# EAGLE board plat_4pinTo40pin (EAGLE 5.11)
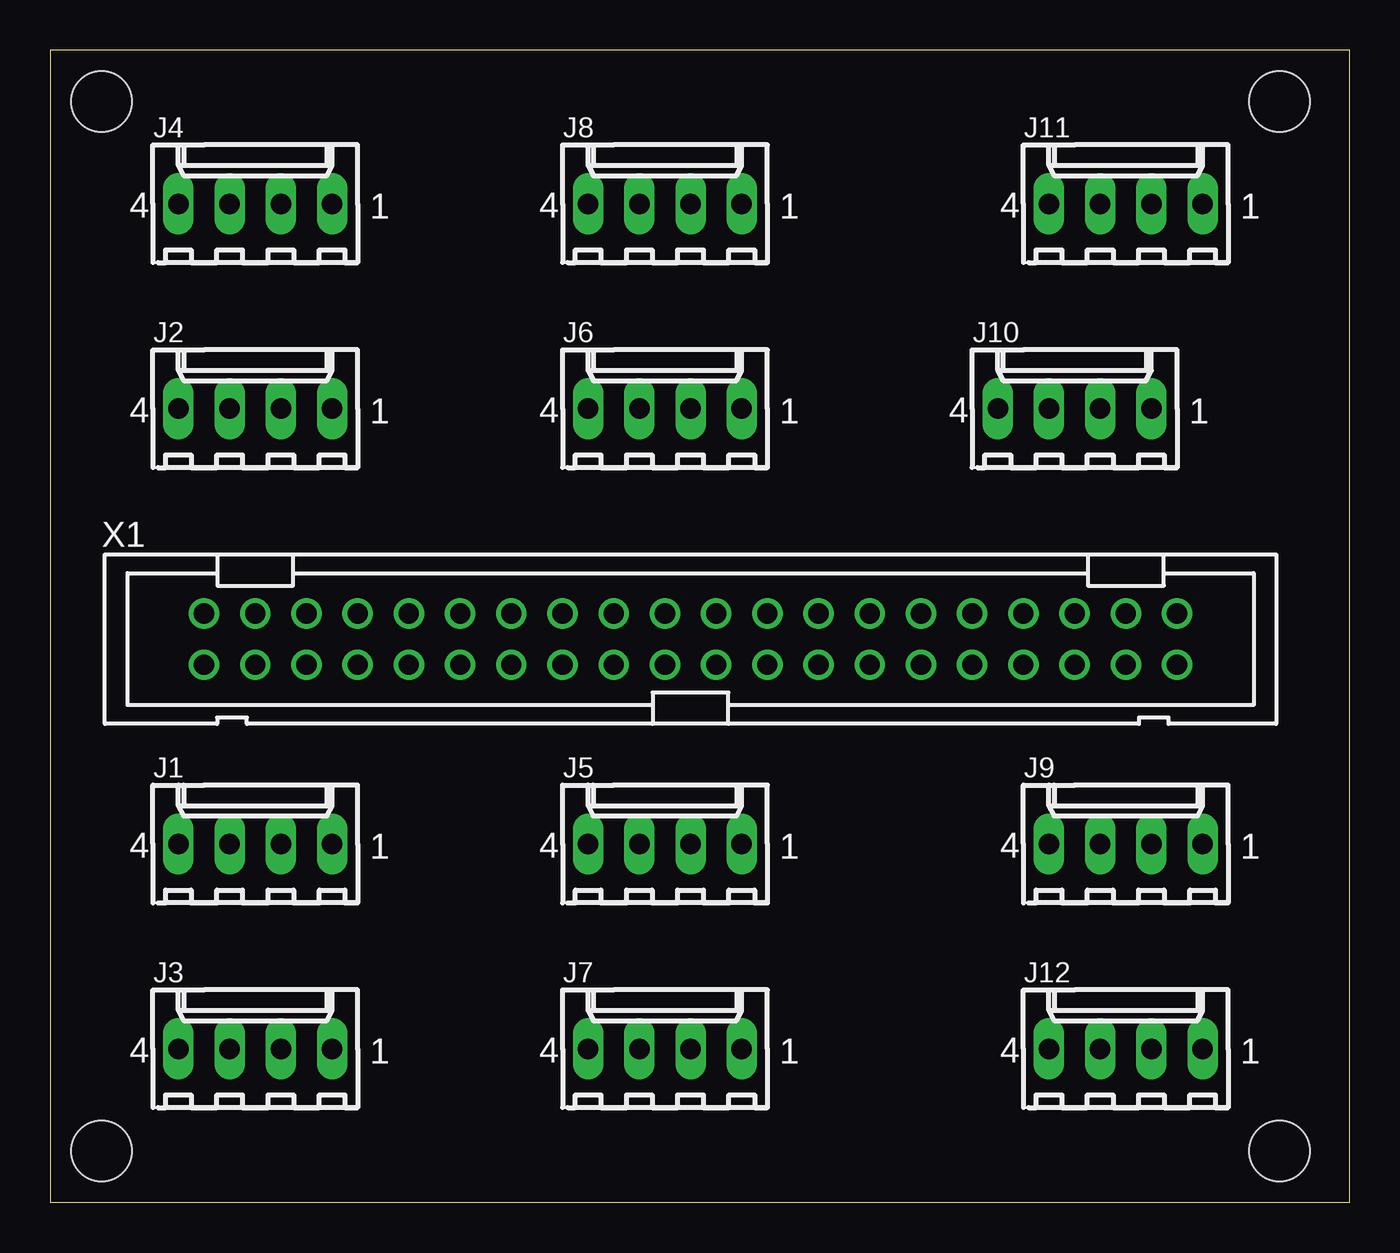
[diagram p0: board, top side]
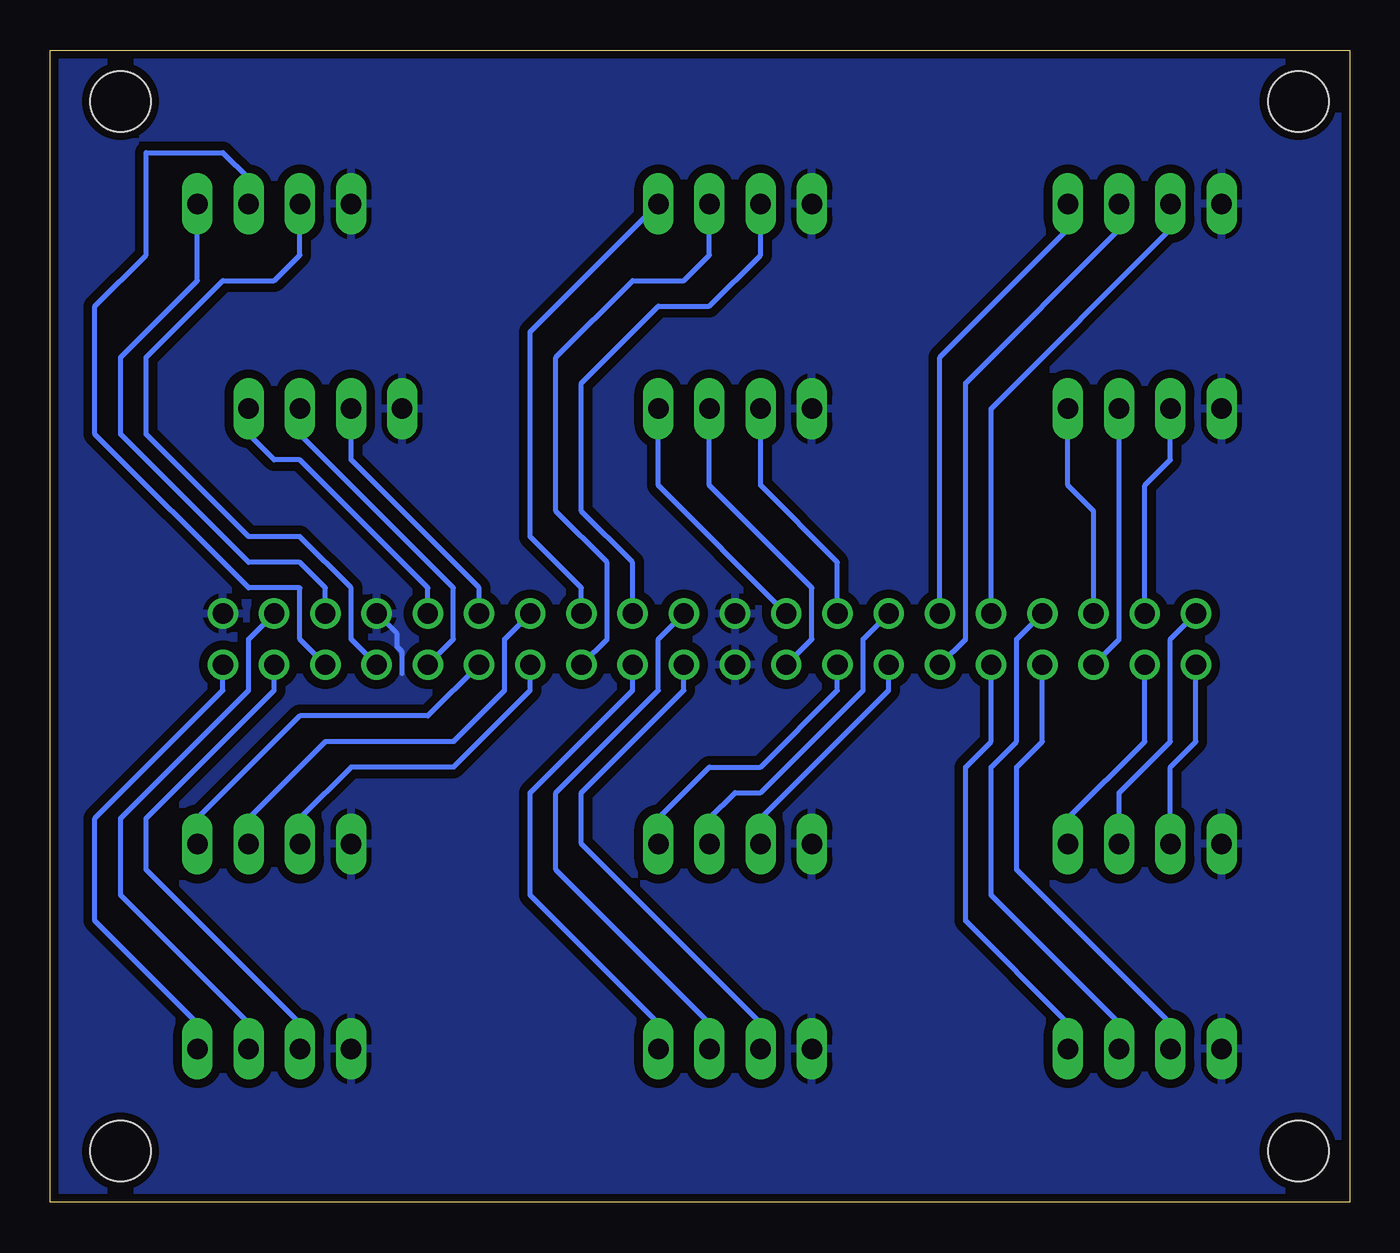
[diagram p1: board, bottom side, seen from below]

Size 64.44 x 57.14 mm. Coordinates in mm from the lower left corner, seen from the top.
Outline: 0,0 64.44,0 64.44,57.14 0,57.14 0,0
Copper layers (1*16): Top 0.035mm / dielectric 1.5mm / Bottom 0.035mm
Design rules "default *": minimum track width 10mil, minimum drill 24mil, track to track 17mil, track to pad 15mil, pad to pad 17mil, via to via 16mil, smd to smd 15mil, copper to edge 16mil, drill to drill 8mil, minimum pad ring 10mil, minimum via ring 8mil, stop-mask expansion 4mil, vias tented up to drill 0mil, thermal gap 10mil
Holes 3 mm at 2.54,54.61 2.54,2.54 60.96,54.61 60.96,2.54

## Footprints (pad centres in the part's own frame; a part is rotated, then mirrored left to right if it is on the bottom)
6410-04 = drill 1.016 long: 1 3.81,0; 2 1.27,0; 3 -1.27,0; 4 -3.81,0
PAK100/2500-40 = drill 1 pad 1.422 round: 1 -24.13,-1.27; 2 -24.13,1.27; 3 -21.59,-1.27; 4 -21.59,1.27; 5 -19.05,-1.27; 6 -19.05,1.27; 7 -16.51,-1.27; 8 -16.51,1.27; 9 -13.97,-1.27; 10 -13.97,1.27; 11 -11.43,-1.27; 12 -11.43,1.27; 13 -8.89,-1.27; 14 -8.89,1.27; 15 -6.35,-1.27; 16 -6.35,1.27; 17 -3.81,-1.27; 18 -3.81,1.27; 19 -1.27,-1.27; 20 -1.27,1.27; 21 1.27,-1.27; 22 1.27,1.27; 23 3.81,-1.27; 24 3.81,1.27; 25 6.35,-1.27; 26 6.35,1.27; 27 8.89,-1.27; 28 8.89,1.27; 29 11.43,-1.27; 30 11.43,1.27; 31 13.97,-1.27; 32 13.97,1.27; 33 16.51,-1.27; 34 16.51,1.27; 35 19.05,-1.27; 36 19.05,1.27; 37 21.59,-1.27; 38 21.59,1.27; 39 24.13,-1.27; 40 24.13,1.27

## Placement (x,y rotation side)
J1  22-27-2041-04  [6410-04]  10.16,17.78 0 top
J2  22-27-2041-04  [6410-04]  10.16,39.37 0 top
J3  22-27-2041-04  [6410-04]  10.16,7.62 0 top
J4  22-27-2041-04  [6410-04]  10.16,49.53 0 top
J5  22-27-2041-04  [6410-04]  30.48,17.78 0 top
J6  22-27-2041-04  [6410-04]  30.48,39.37 0 top
J7  22-27-2041-04  [6410-04]  30.48,7.62 0 top
J8  22-27-2041-04  [6410-04]  30.48,49.53 0 top
J9  22-27-2041-04  [6410-04]  53.34,17.78 0 top
J10  22-27-2041-04  [6410-04]  50.8,39.37 0 top
J11  22-27-2041-04  [6410-04]  53.34,49.53 0 top
J12  22-27-2041-04  [6410-04]  53.34,7.62 0 top
X1  2540-  [PAK100/2500-40]  31.75,27.94 0 top

## Library data of the parts
J1-J12 = con-molex; OC_FARNELL: unknown; OC_NEWARK: unknown
X1 = con-3m; OC_FARNELL: unknown; OC_NEWARK: unknown

## Nets
GND: J1.4 J2.4 J3.4 J4.4 J5.4 J6.4 J7.4 J8.4 J9.4 J10.4 J11.4 J12.4 X1.19 X1.20 X1.34 X1.40
NET_1: J1.3 X1.1
NET_2: J1.2 X1.2
NET_3: J1.1 X1.3
NET_4: J2.3 X1.4
NET_5: J2.2 X1.5
NET_6: J2.1 X1.6
NET_7: J3.3 X1.7
NET_8: J3.2 X1.8
NET_9: J3.1 X1.9
NET_10: J4.3 X1.10
NET_11: J4.2 X1.11
NET_12: J4.1 X1.12
NET_13: J5.3 X1.13
NET_14: J5.2 X1.14
NET_15: J5.1 X1.15
NET_16: J6.3 X1.16
NET_17: J6.2 X1.17
NET_18: J6.1 X1.18
NET_21: J7.3 X1.21
NET_22: J7.2 X1.22
NET_23: J7.1 X1.23
NET_24: J8.3 X1.24
NET_25: J8.2 X1.25
NET_26: J8.1 X1.26
NET_27: J9.3 X1.27
NET_28: J9.2 X1.28
NET_29: J9.1 X1.29
NET_30: J10.3 X1.30
NET_31: J10.2 X1.31
NET_32: J10.1 X1.32
NET_33: J11.3 X1.33
NET_35: J11.2 X1.35
NET_36: J11.1 X1.36
NET_37: J12.3 X1.37
NET_38: J12.2 X1.38
NET_39: J12.1 X1.39

## Tracks (layer width: path | path; a pad name or v marks a point on that pad's centre or on a via)
GND
  Bottom 0.254: X1.34 47.24,28.19 47.24,27.56 46.99,27.3 46.99,26.42 46.99,26.24
  pour Bottom (isolate 0.254): 66.04,58.42 -1.27,58.42 0,0 64.77,0
NET_1
  Bottom 0.254: X1.1 7.62,22.86 8.89,21.59 J1.3
NET_2
  Bottom 0.254: X1.2 8.89,27.94 8.89,22.86 11.43,20.32 J1.2
NET_3
  Bottom 0.254: X1.3 10.16,22.86 13.97,19.05 J1.1
NET_4
  Bottom 0.254: X1.4 10.16,35.56 8.89,36.83 J2.3
NET_5
  Bottom 0.254: X1.5 11.43,27.94 J2.2
NET_6
  Bottom 0.254: X1.6 12.7,34.29 13.97,35.56 J2.1
NET_7
  Bottom 0.254: J3.3 8.89,8.89 16.51,16.51 16.51,21.59 15.24,22.86 X1.7
NET_8
  Bottom 0.254: X1.8 16.51,27.94 16.51,22.86 17.78,21.59 17.78,15.24 11.43,8.89 J3.2
NET_9
  Bottom 0.254: J3.1 13.97,8.89 19.05,13.97 19.05,21.59 17.78,22.86 X1.9
NET_10
  Bottom 0.254: X1.10 17.78,39.37 8.89,48.26 J4.3
NET_11
  Bottom 0.254: X1.11 19.05,27.94 19.05,40.64 11.43,48.26 J4.2
NET_12
  Bottom 0.254: J4.1 13.97,48.26 20.32,41.91 X1.12
NET_13
  Bottom 0.254: J5.3 29.21,19.05 22.86,25.4 X1.13
NET_14
  Bottom 0.254: X1.14 24.13,27.94 24.13,25.4 29.21,20.32 30.48,20.32 31.75,19.05 J5.2
NET_15
  Bottom 0.254: X1.15 25.4,25.4 29.21,21.59 31.75,21.59 34.29,19.05 J5.1
NET_16
  Bottom 0.254: X1.16 25.4,31.75 29.21,35.56 J6.3
NET_17
  Bottom 0.254: X1.17 26.67,27.94 26.67,30.48 31.75,35.56 J6.2
NET_18
  Bottom 0.254: X1.18 34.29,35.56 J6.1
NET_21
  Bottom 0.254: X1.21 33.02,25.4 38.1,20.32 38.1,17.78 29.21,8.89 J7.3
NET_22
  Bottom 0.254: X1.22 34.29,27.94 34.29,25.4 39.37,20.32 39.37,16.51 31.75,8.89 J7.2
NET_23
  Bottom 0.254: X1.23 35.56,25.4 40.64,20.32 40.64,15.24 34.29,8.89 J7.1
NET_24
  Bottom 0.254: X1.24 35.56,31.75 38.1,34.29 38.1,40.64 34.29,44.45 31.75,44.45 29.21,46.99 J8.3
NET_25
  Bottom 0.254: X1.25 36.83,27.94 36.83,31.75 39.37,34.29 39.37,41.91 35.56,45.72 33.02,45.72 31.75,46.99 J8.2
NET_26
  Bottom 0.254: X1.26 38.1,30.48 40.64,33.02 40.64,43.18 J8.1
NET_27
  Bottom 0.254: X1.27 40.64,25.4 44.45,21.59 49.53,21.59 52.07,19.05 J9.3
NET_28
  Bottom 0.254: X1.28 41.91,27.94 41.91,25.4 44.45,22.86 50.8,22.86 54.61,19.05 J9.2
NET_29
  Bottom 0.254: X1.29 45.72,24.13 52.07,24.13 57.15,19.05 J9.1
NET_30
  Bottom 0.254: X1.30 43.18,30.48 49.53,36.83 J10.3
NET_31
  Bottom 0.254: X1.31 44.45,27.94 44.45,30.48 52.07,38.1 J10.2
NET_32
  Bottom 0.254: X1.32 45.72,30.48 52.07,36.83 53.34,36.83 54.61,38.1 J10.1
NET_33
  Bottom 0.254: X1.33 49.53,27.94 49.53,30.48 52.07,33.02 54.61,33.02 59.69,38.1 59.69,41.91 55.88,45.72 53.34,45.72 52.07,46.99 J11.3
NET_35
  Bottom 0.254: X1.35 52.07,27.94 52.07,30.48 54.61,30.48 62.23,38.1 62.23,44.45 59.69,46.99 59.69,52.07 55.88,52.07 54.61,50.8 J11.2
NET_36
  Bottom 0.254: X1.36 50.8,30.48 52.07,31.75 54.61,31.75 60.96,38.1 60.96,41.91 57.15,45.72 J11.1
NET_37
  Bottom 0.254: X1.37 53.34,25.4 59.69,19.05 59.69,16.51 52.07,8.89 J12.3 52.07,6.35
NET_38
  Bottom 0.254: X1.38 54.61,27.94 54.61,25.4 60.96,19.05 60.96,15.24 54.61,8.89 J12.2 54.61,6.35
NET_39
  Bottom 0.254: 57.15,6.35 J12.1 57.15,8.89 62.23,13.97 62.23,19.05 55.88,25.4 X1.39